# Altium PCB BalEv.PcbDoc
Units mm, origin at the board's own origin, x right, y up, seen from the top; angles counter-clockwise.
Board outline 110 x 150 mm, 4 copper layers (Top Layer, Ground, Power, Bottom Layer), stack 1.536 mm thick; 142 components, 56 nets, 403 pads, 44 vias.
Unrouted connection lines stored in the file: 114.
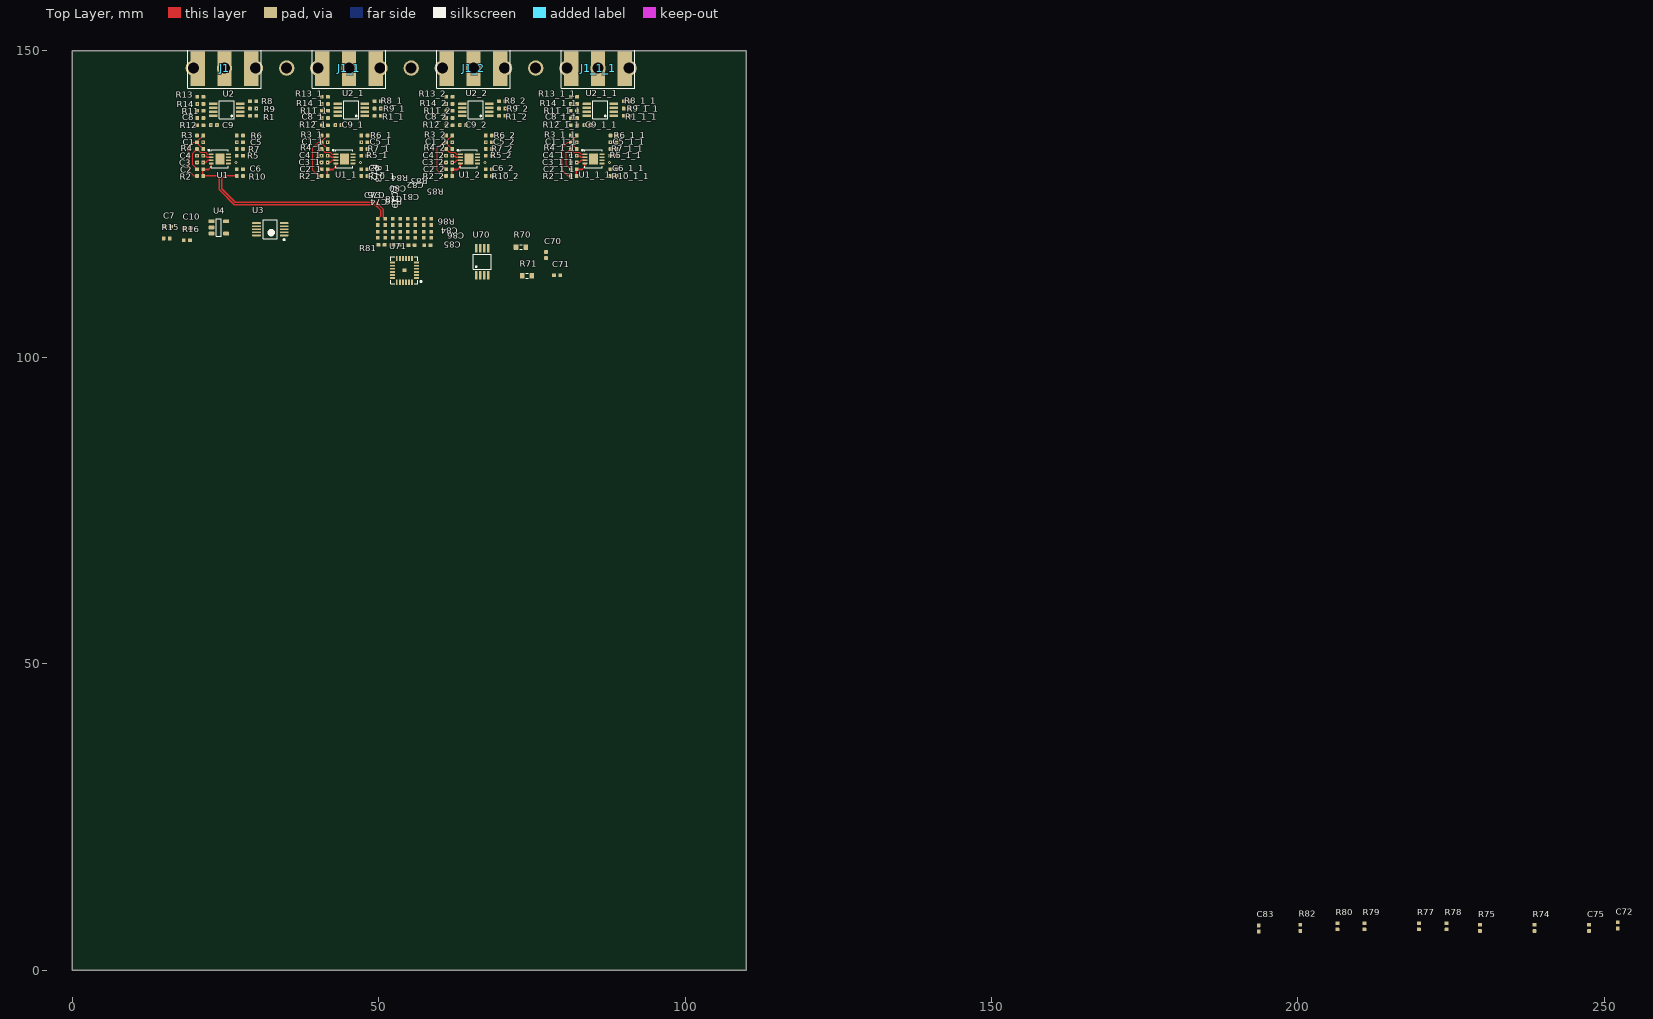
[diagram p0: Top Layer view]
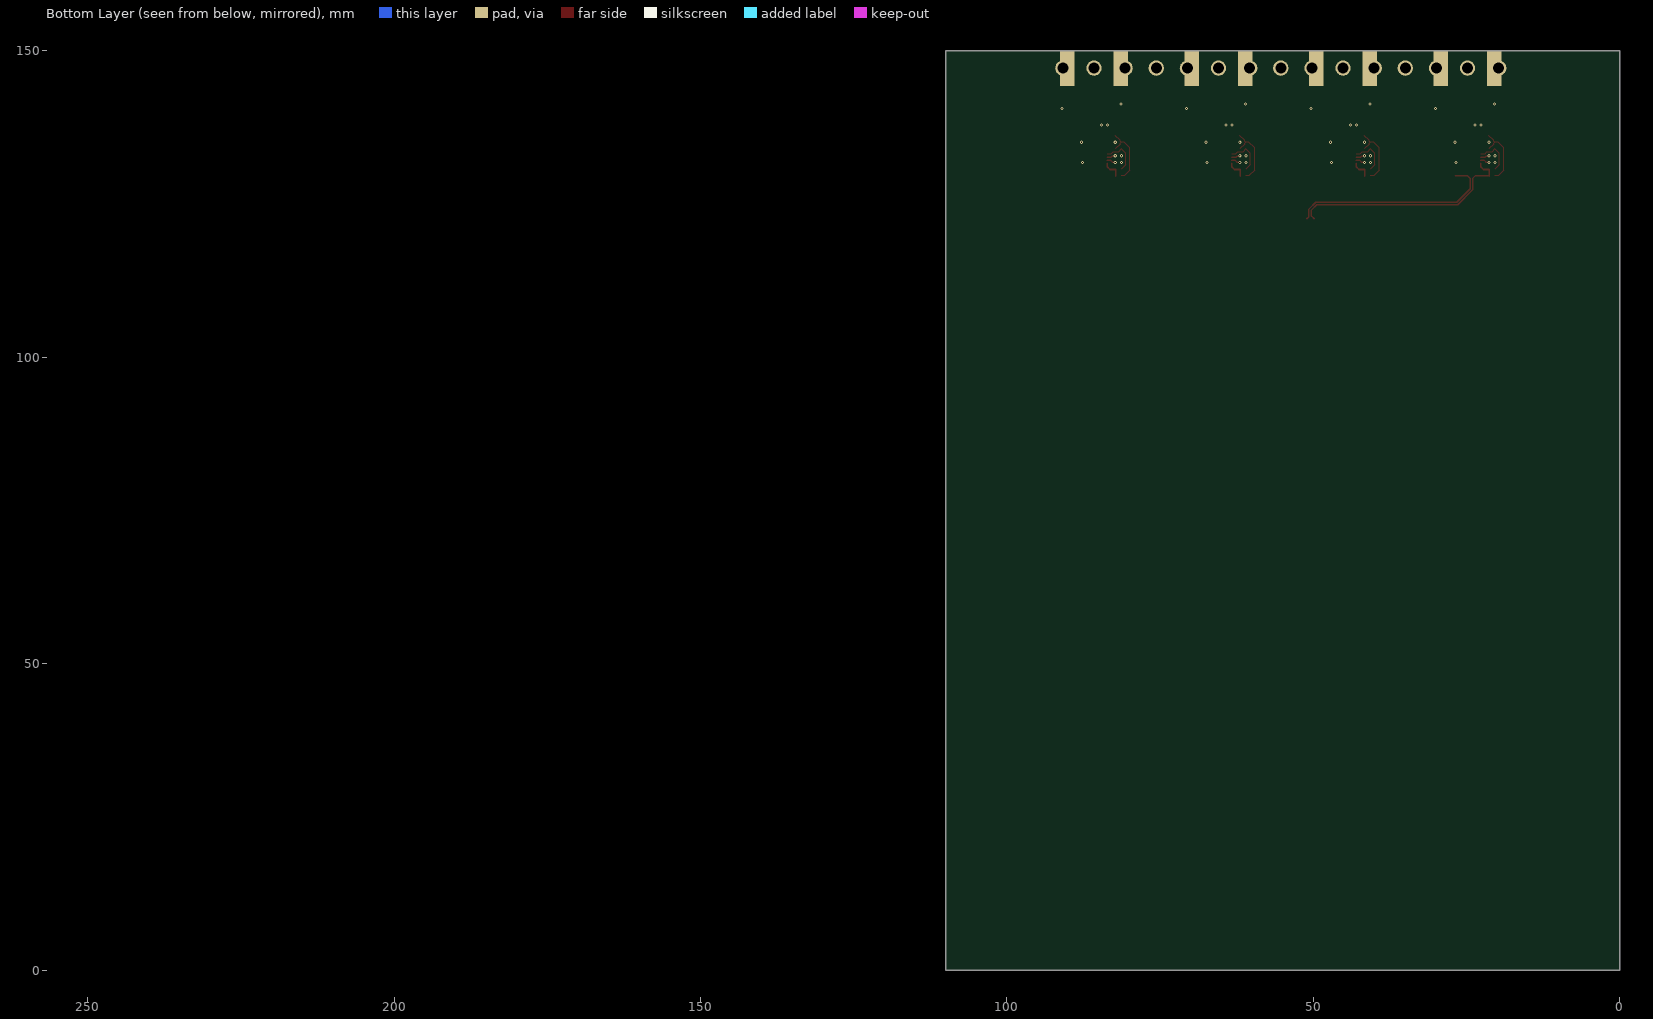
[diagram p1: Bottom Layer view, seen from below]
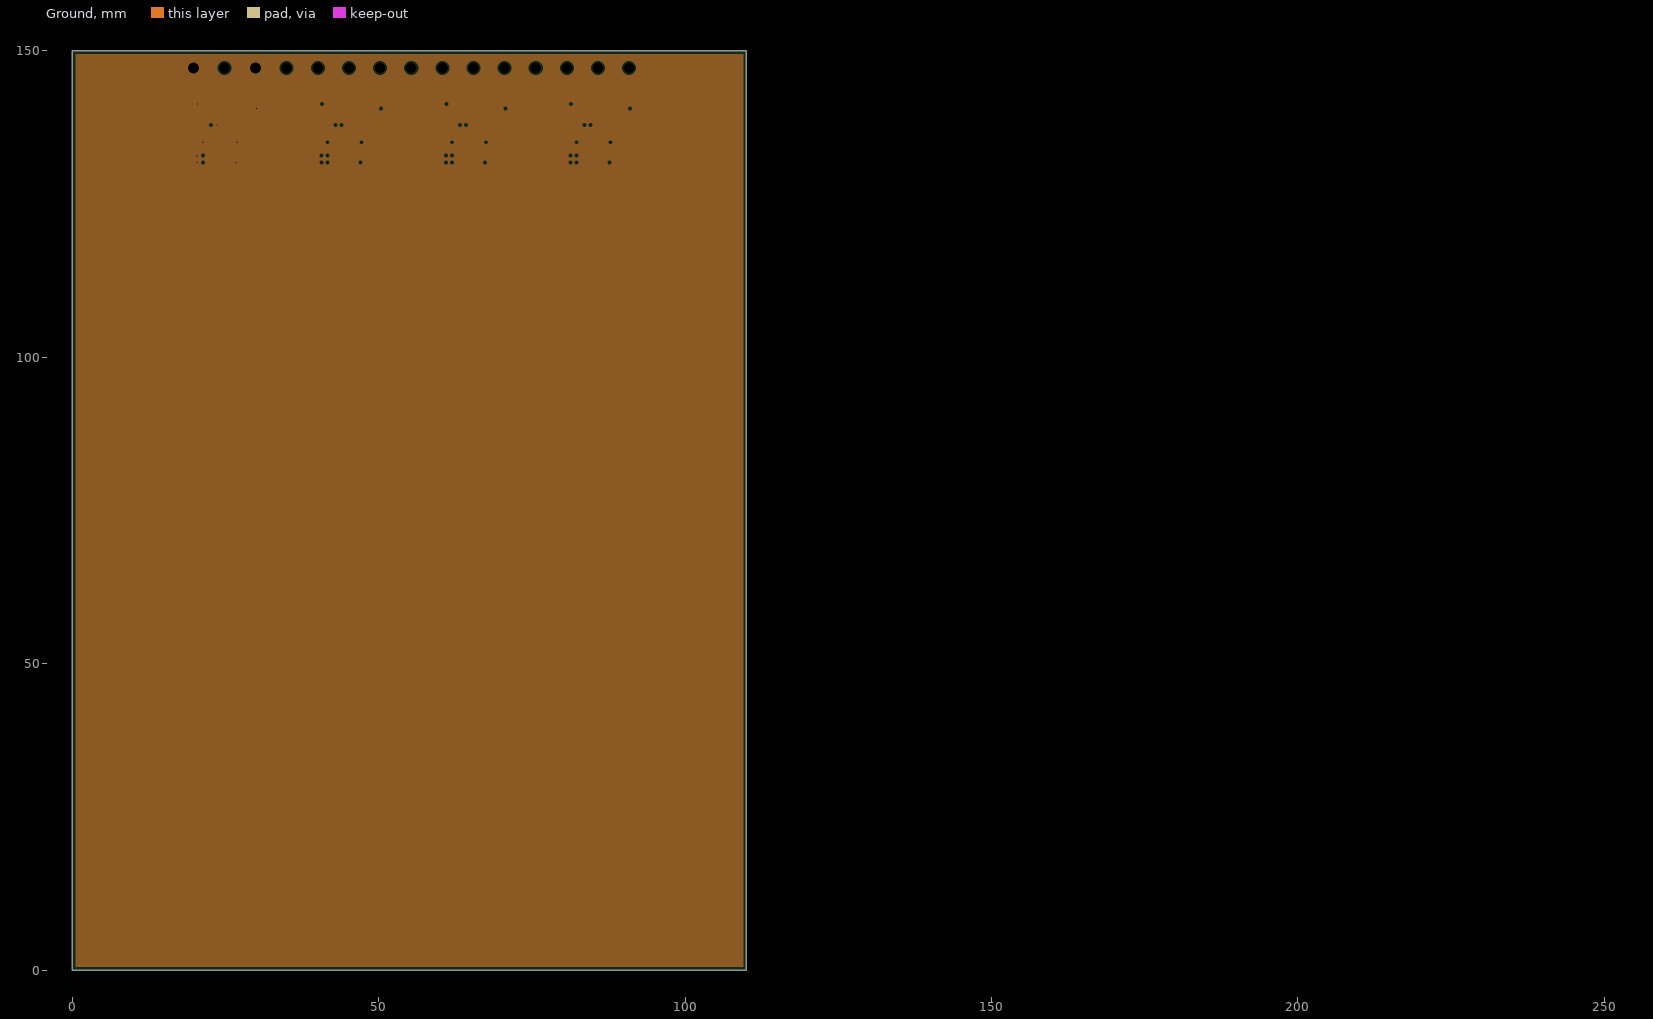
[diagram p2: Ground, clearances drawn from the general rule]
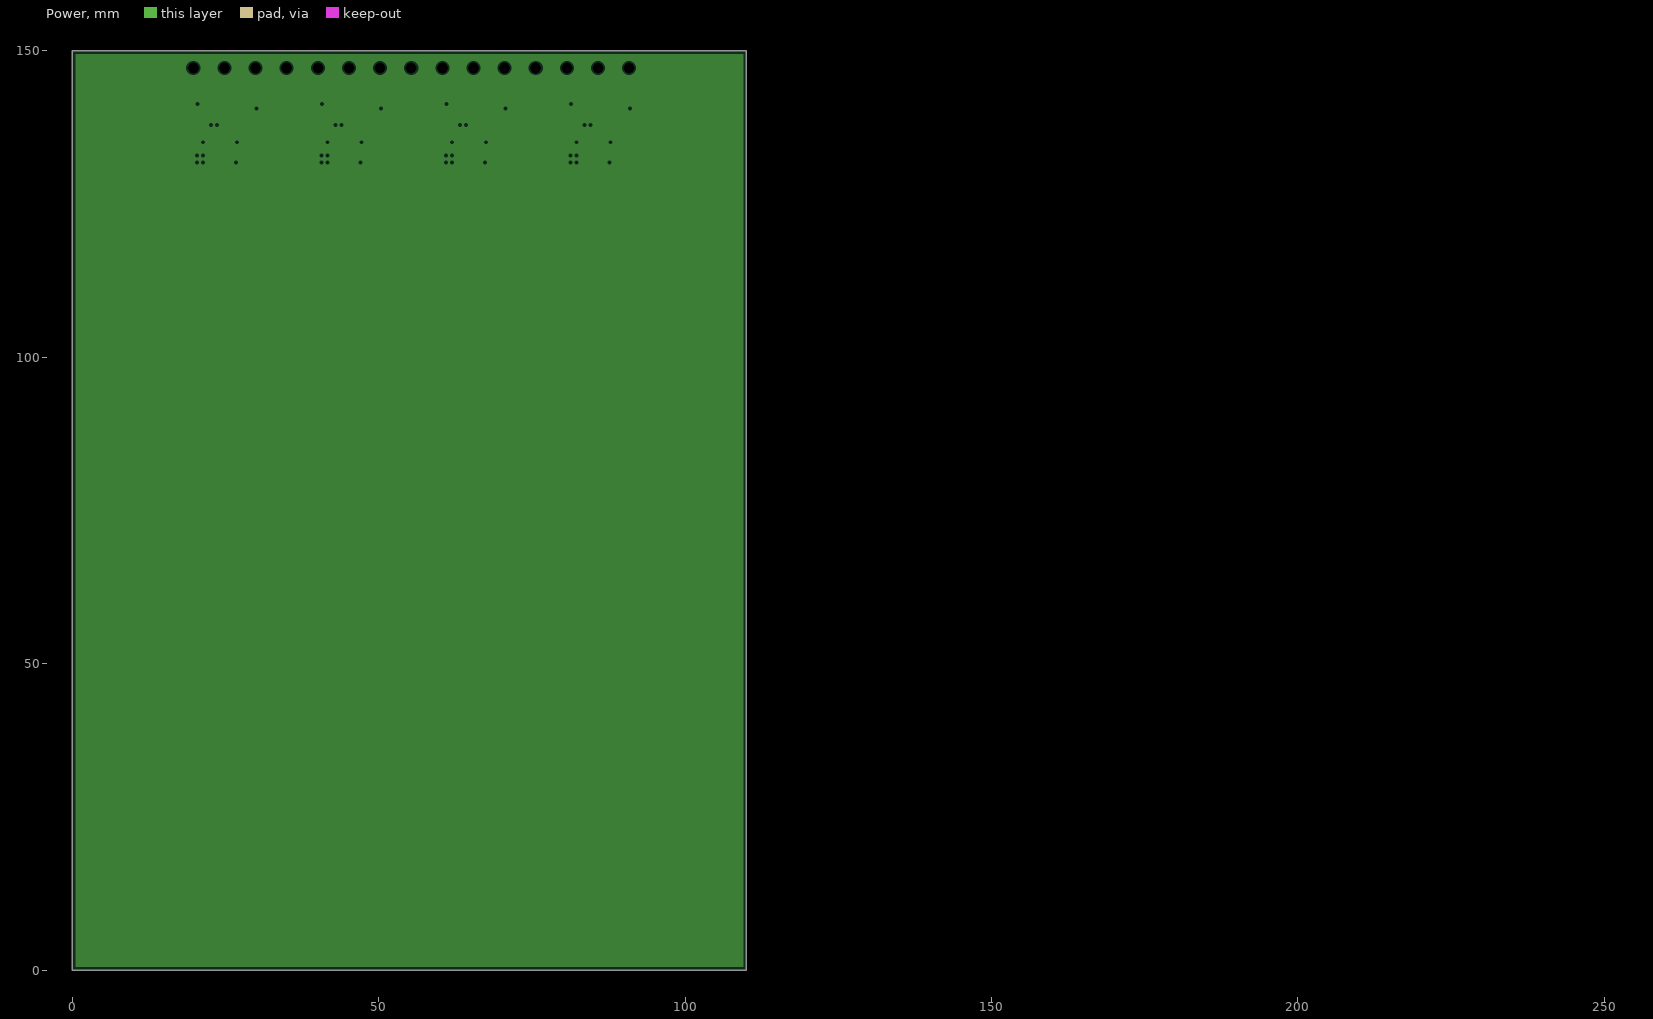
[diagram p3: Power, clearances drawn from the general rule]

## Layer stack, top to bottom
Top Solder: solder mask 0.01, Solder Resist, Dk 3.5
Top Layer: signal copper 0.018
Dielectric 1: prepreg 0.36, PP-006, Dk 4.1
Ground: plane copper 0.035, net GND
Dielectric 2: prepreg 0.71, PP-006, Dk 4.1
Power: plane copper 0.035
Dielectric1: core 0.36, FR-4, Dk 4.8
Bottom Layer: signal copper 0.018
Bottom Solder: solder mask 0.01, Solder Resist, Dk 3.5

## Board outline
0,0 0,150 110,150 110,0

## Design rules (kind name [scope] priority, off if disabled: settings)
AssemblyTestPointUsage [All] p1 off:
AssemblyTestpoint [All] p1 off: testpointundercomponent=TRUE minsize=1.016 maxsize=2.54 preferedsize=1.524 minholesize=0 maxholesize=1.016 preferedholesize=0.813 testpointgrid=0.025 usegrid=TRUE gridtolerance=0 allowsidetop=TRUE allowsidebottom=TRUE
BoardOutlineClearance [All] p1 off: gap=0.25 ignorepadtopadclearanceinfootprint=FALSE except(0: Arc-SplitContinuation Track-SplitContinuation SMDPad-SplitContinuation THPad-SplitContinuation Via-SplitContinuation Fill-SplitContinuation Poly-SplitContinuation Region-SplitContinuation Text-SplitContinuation)
Clearance [All] p1: gap=0.15 ignorepadtopadclearanceinfootprint=FALSE
ComponentClearance [All] p1: gap=0.25 collisioncheckmode=3 verticalgap=0 showdistances=FALSE
DiffPairsRouting [All] p1 off: maxlimit=0.25 minlimit=0.25 mostfreqgap=0.25 toplayer_minwidth=0.381 toplayer_maxwidth=0.381 toplayer_prefwidth=0.381 bottomlayer_minwidth=0.381 bottomlayer_maxwidth=0.381 bottomlayer_prefwidth=0.381 maxuncoupledlength=12.5
FabricationTestPointUsage [All] p1 off: valid=0 allowmultiple=FALSE
FabricationTestpoint [All] p1 off: side=3 testpointundercomponent=TRUE minsize=1.016 maxsize=2.54 preferedsize=1.524 minholesize=0 maxholesize=1.016 preferedholesize=0.813 testpointgrid=0.025 allowsidetop=TRUE allowsidebottom=TRUE usegrid=TRUE gridtolerance=0
FanoutControl Fanout_BGA [IsBGA] p1 off: bgadir=Out bgaviamode=Centered fanoutstyle=Auto fanoutdirection=Alternating viagrid=0.025 // Fanout_BGA (Default Rule)
FanoutControl Fanout_LCC [IsLCC] p2 off: bgadir=Out bgaviamode=Centered fanoutstyle=Auto fanoutdirection=Alternating viagrid=0.025 // Fanout_LCC (Default Rule)
FanoutControl Fanout_SOIC [IsSOIC] p3 off: bgadir=Out bgaviamode=Centered fanoutstyle=Auto fanoutdirection=Alternating viagrid=0.025 // Fanout_SOIC (Default Rule)
FanoutControl Fanout_Small [(CompPinCount < 5)] p4 off: bgadir=Out bgaviamode=Centered fanoutstyle=Auto fanoutdirection=OutThenIn viagrid=0.025 // Fanout_Small (Default Rule)
FanoutControl Fanout_Default [All] p5 off: bgadir=Out bgaviamode=Centered fanoutstyle=Auto fanoutdirection=Alternating viagrid=0.025 // Fanout_Default (Default Rule)
Height [All] p1 off: minheight=0 maxheight=500 prefheight=12.5
HoleSize HoleSize-PTH [All] p1: absolutevalues=TRUE maxlimit=10 minlimit=0.15 maxpercent=80.000 minpercent=20.000
HoleToHoleClearance [All] p1 off: gap=0.35 allowstackedmicrovias=TRUE
LayerPairs [All] p1 off: enforce=TRUE
MinimumAnnularRing "Minimum IAR  >0.45mm" [((ObjectKind = 'Pad') OR (ObjectKind = 'Via')) And (Layer = 'MultiLayer') And (HoleDiameter > AsMM(0.45))] p1 off: minimumring=0.175 // minimum inner annular ring for pads > 0.45mm finished hole size
MinimumAnnularRing "Minimum IAR <=0.45mm" [((ObjectKind = 'Pad') OR (ObjectKind = 'Via')) And (Layer = 'MultiLayer') And (HoleDiameter <= AsMM(0.45))] p2 off: minimumring=0.1 // minimum inner annular ring for pads <= 0.45mm finished hole size
MinimumSolderMaskSliver [All] p1 off: minsoldermaskwidth=0.08
NetAntennae [All] p1 off: netantennaetolerance=0
PasteMaskExpansion [All] p1 off: expansion=0
PlaneClearance PlaneClearance-IPI [All] p1: clearance=0.25
PlaneConnect [All] p1: planeconnectstyle=Direct reliefexpansion=0.175 reliefentries=4 reliefconductorwidth=0.2 reliefairgap=0.2
PolygonConnect PolygonConnect-xTW [All] p1: connectstyle=Direct reliefconductorwidth=0.5 reliefentries=4 polygonreliefangle="90 Angle" airgapwidth=0.5
RoutingCorners [All] p1 off: cornerstyle=45-Degree minsetback=2.5 maxsetback=2.5
RoutingLayers [All] p1 off: top layer_v5=TRUE bottom layer_v5=TRUE
RoutingPriority [All] p1 off: routingpriority=0
RoutingTopology [All] p1 off: topology=Shortest
RoutingVias [All] p1: holewidth=0.25 width=0.8 viastyle="Through Hole" minholewidth=0.15 minwidth=0.5 maxholewidth=0.45 maxwidth=0.8 useviatemplates=TRUE viatemplateguid#1={B5015574-1706-43D0-909C-7C5F51C7AC2F} viatemplatename#1=v50h15m0mx0 // finishet hole size <= 0.45mm
SilkToSilkClearance [All] p1 off: silktosilkclearance=0.2
SilkToSolderMaskClearance SilkscreenOverComponentPads [IsPad] p1 off: minsilkscreentomaskgap=0.2 clearancetoexposedcopper=TRUE
SolderMaskExpansion [All] p1 off: expansion=0 istentingtop=FALSE
UnRoutedNet [All] p1: checkbadconnections=TRUE
Width Width-xTW [All] p1: maxlimit=0.6 minlimit=0.15 preferedwidth=0.3
3 further rules are at their usual default settings.

## Classes and differential pairs
component class BalEv_ADC_v1_0: C70 C71 C72 C73 C74 C75 C76 C77 C78 C79 C80 C81 C82 C83 C84 C85 C86 R70 R71 R72 R73 R74 R75 R76 R77 R78 R79 R80 R81 R82 R83 R84 R85 R86 U70 U71
component class BalEv_AINa_v1_0: C1 C2 C3 C4 C5 C6 C7 C8 C9 C10 J1 R1 R2 R3 R4 R5 R6 R7 R8 R9 R10 R11 R12 R13 R14 R15 R16 U1 U2 U3 U4

## Components (designator, comment, footprint, x,y, rotation, side; value= is the part's Value field where it differs from the comment)
C1 "NC" "CAPACITOR 1005 REFLOW" 20.85,135.1 r180 top
C1_1 "NC" "CAPACITOR 1005 REFLOW" 41.17,135.1 r180 top
C1_1_1 "NC" "CAPACITOR 1005 REFLOW" 81.81,135.1 r180 top
C1_2 "NC" "CAPACITOR 1005 REFLOW" 61.49,135.1 r180 top
C2 "22pF" "CAPACITOR 1005 REFLOW" 20.85,130.7 r180 top
C2_1 "22pF" "CAPACITOR 1005 REFLOW" 41.17,130.7 r180 top
C2_1_1 "22pF" "CAPACITOR 1005 REFLOW" 81.81,130.7 r180 top
C2_2 "22pF" "CAPACITOR 1005 REFLOW" 61.49,130.7 r180 top
C3 "100nF" "CAPACITOR 1005 REFLOW" 20.85,131.8 r0 top
C3_1 "100nF" "CAPACITOR 1005 REFLOW" 41.17,131.8 r0 top
C3_1_1 "100nF" "CAPACITOR 1005 REFLOW" 81.81,131.8 r0 top
C3_2 "100nF" "CAPACITOR 1005 REFLOW" 61.49,131.8 r0 top
C4 "100nF" "CAPACITOR 1005 REFLOW" 20.85,132.9 r0 top
C4_1 "100nF" "CAPACITOR 1005 REFLOW" 41.17,132.9 r0 top
C4_1_1 "100nF" "CAPACITOR 1005 REFLOW" 81.81,132.9 r0 top
C4_2 "100nF" "CAPACITOR 1005 REFLOW" 61.49,132.9 r0 top
C5 "NC" "CAPACITOR 1005 REFLOW" 27.35,135.1 r180 top
C5_1 "NC" "CAPACITOR 1005 REFLOW" 47.67,135.1 r180 top
C5_1_1 "NC" "CAPACITOR 1005 REFLOW" 88.31,135.1 r180 top
C5_2 "NC" "CAPACITOR 1005 REFLOW" 67.99,135.1 r180 top
C6 "22pF" "CAPACITOR 1005 REFLOW" 27.35,130.7 r0 top
C6_1 "22pF" "CAPACITOR 1005 REFLOW" 47.67,130.7 r0 top
C6_1_1 "22pF" "CAPACITOR 1005 REFLOW" 88.31,130.7 r0 top
C6_2 "22pF" "CAPACITOR 1005 REFLOW" 67.99,130.7 r0 top
C7 "100nF" "CAPACITOR 1005 REFLOW" 15.6,121.3 r180 top
C8 "470pF" "CAPACITOR 1005 REFLOW" 20.9,139.05 r180 top
C8_1 "470pF" "CAPACITOR 1005 REFLOW" 41.22,139.05 r180 top
C8_1_1 "470pF" "CAPACITOR 1005 REFLOW" 81.86,139.05 r180 top
C8_2 "470pF" "CAPACITOR 1005 REFLOW" 61.54,139.05 r180 top
C9 "100nF" "CAPACITOR 1005 REFLOW" 23.1,137.9 r0 top
C9_1 "100nF" "CAPACITOR 1005 REFLOW" 43.42,137.9 r0 top
C9_1_1 "100nF" "CAPACITOR 1005 REFLOW" 84.06,137.9 r0 top
C9_2 "100nF" "CAPACITOR 1005 REFLOW" 63.74,137.9 r0 top
C10 "100nF" "CAPACITOR 1005 REFLOW" 18.775,121.1 r0 top
C70 "100n" "CAPACITOR 1005 REFLOW" 77.3,116.7 r90 top
C71 "100n" "CAPACITOR 1005 REFLOW" 79.1,113.4 r0 top
C72 "1u" "CAPACITOR 1005 REFLOW" 252.2,7.3 r90 top
C73 "68pF" "CAPACITOR 1005 REFLOW" 49.85,120 r90 top
C74 "68pF" "CAPACITOR 1005 REFLOW" 50.45,118.35 r180 top
C75 "1u" "CAPACITOR 1005 REFLOW" 247.499,6.899 r90 top
C76 "68pF" "CAPACITOR 1005 REFLOW" 51.05,120 r270 top
C77 "68pF" "CAPACITOR 1005 REFLOW" 52.301,119.999 r90 top
C78 "68pF" "CAPACITOR 1005 REFLOW" 52.901,118.349 r180 top
C79 "68pF" "CAPACITOR 1005 REFLOW" 53.501,119.999 r270 top
C80 "68pF" "CAPACITOR 1005 REFLOW" 54.751,119.999 r90 top
C81 "68pF" "CAPACITOR 1005 REFLOW" 55.351,118.299 r180 top
C82 "68pF" "CAPACITOR 1005 REFLOW" 55.951,119.999 r270 top
C83 "100n" "CAPACITOR 1005 REFLOW" 193.6,6.8 r90 top
C84 "68pF" "CAPACITOR 1005 REFLOW" 58.55,119.999 r90 top
C85 "68pF" "CAPACITOR 1005 REFLOW" 57.95,118.299 r0 top
C86 "68pF" "CAPACITOR 1005 REFLOW" 57.35,119.999 r270 top
J1 "AIN0" "SMA EDGE Molex 732511150" 24.82,150.1 r270 top
J1_1 "AIN0" "SMA EDGE Molex 732511150" 45.14,150.1 r270 top
J1_1_1 "AIN0" "SMA EDGE Molex 732511150" 85.78,150.1 r270 top
J1_2 "AIN0" "SMA EDGE Molex 732511150" 65.46,150.1 r270 top
R1 "4.7k" "RESISTOR 1005 REFLOW" 29.5,139.4 r180 top
R1_1 "4.7k" "RESISTOR 1005 REFLOW" 49.82,139.4 r180 top
R1_1_1 "4.7k" "RESISTOR 1005 REFLOW" 90.46,139.4 r180 top
R1_2 "4.7k" "RESISTOR 1005 REFLOW" 70.14,139.4 r180 top
R2 "2k" "RESISTOR 1005 REFLOW" 20.85,129.6 r0 top
R2_1 "2k" "RESISTOR 1005 REFLOW" 41.17,129.6 r0 top
R2_1_1 "2k" "RESISTOR 1005 REFLOW" 81.81,129.6 r0 top
R2_2 "2k" "RESISTOR 1005 REFLOW" 61.49,129.6 r0 top
R3 "1k" "RESISTOR 1005 REFLOW" 20.85,136.2 r0 top
R3_1 "1k" "RESISTOR 1005 REFLOW" 41.17,136.2 r0 top
R3_1_1 "1k" "RESISTOR 1005 REFLOW" 81.81,136.2 r0 top
R3_2 "1k" "RESISTOR 1005 REFLOW" 61.49,136.2 r0 top
R4 "0" "RESISTOR 1005 REFLOW" 20.85,134 r0 top
R4_1 "0" "RESISTOR 1005 REFLOW" 41.17,134 r0 top
R4_1_1 "0" "RESISTOR 1005 REFLOW" 81.81,134 r0 top
R4_2 "0" "RESISTOR 1005 REFLOW" 61.49,134 r0 top
R5 "NC" "RESISTOR 1005 REFLOW" 27.35,132.9 r0 top
R5_1 "NC" "RESISTOR 1005 REFLOW" 47.67,132.9 r0 top
R5_1_1 "NC" "RESISTOR 1005 REFLOW" 88.31,132.9 r0 top
R5_2 "NC" "RESISTOR 1005 REFLOW" 67.99,132.9 r0 top
R6 "1k" "RESISTOR 1005 REFLOW" 27.35,136.2 r180 top
R6_1 "1k" "RESISTOR 1005 REFLOW" 47.67,136.2 r180 top
R6_1_1 "1k" "RESISTOR 1005 REFLOW" 88.31,136.2 r180 top
R6_2 "1k" "RESISTOR 1005 REFLOW" 67.99,136.2 r180 top
R7 "0" "RESISTOR 1005 REFLOW" 27.35,134 r0 top
R7_1 "0" "RESISTOR 1005 REFLOW" 47.67,134 r0 top
R7_1_1 "0" "RESISTOR 1005 REFLOW" 88.31,134 r0 top
R7_2 "0" "RESISTOR 1005 REFLOW" 67.99,134 r0 top
R8 "51" "RESISTOR 1005 REFLOW" 29.5,141.8 r180 top
R8_1 "51" "RESISTOR 1005 REFLOW" 49.82,141.8 r180 top
R8_1_1 "51" "RESISTOR 1005 REFLOW" 90.46,141.8 r180 top
R8_2 "51" "RESISTOR 1005 REFLOW" 70.14,141.8 r180 top
R9 "100K" "RESISTOR 1005 REFLOW" 29.5,140.6 r180 top
R9_1 "100K" "RESISTOR 1005 REFLOW" 49.82,140.6 r180 top
R9_1_1 "100K" "RESISTOR 1005 REFLOW" 90.46,140.6 r180 top
R9_2 "100K" "RESISTOR 1005 REFLOW" 70.14,140.6 r180 top
R10 "2k" "RESISTOR 1005 REFLOW" 27.35,129.6 r180 top
R10_1 "2k" "RESISTOR 1005 REFLOW" 47.67,129.6 r180 top
R10_1_1 "2k" "RESISTOR 1005 REFLOW" 88.31,129.6 r180 top
R10_2 "2k" "RESISTOR 1005 REFLOW" 67.99,129.6 r180 top
R11 "10k" "RESISTOR 1005 REFLOW" 20.9,140.25 r0 top
R11_1 "10k" "RESISTOR 1005 REFLOW" 41.22,140.25 r0 top
R11_1_1 "10k" "RESISTOR 1005 REFLOW" 81.86,140.25 r0 top
R11_2 "10k" "RESISTOR 1005 REFLOW" 61.54,140.25 r0 top
R12 "10k" "RESISTOR 1005 REFLOW" 20.9,137.85 r0 top
R12_1 "10k" "RESISTOR 1005 REFLOW" 41.22,137.85 r0 top
R12_1_1 "10k" "RESISTOR 1005 REFLOW" 81.86,137.85 r0 top
R12_2 "10k" "RESISTOR 1005 REFLOW" 61.54,137.85 r0 top
R13 "10k" "RESISTOR 1005 REFLOW" 20.9,142.5 r180 top
R13_1 "10k" "RESISTOR 1005 REFLOW" 41.22,142.5 r180 top
R13_1_1 "10k" "RESISTOR 1005 REFLOW" 81.86,142.5 r180 top
R13_2 "10k" "RESISTOR 1005 REFLOW" 61.54,142.5 r180 top
R14 "10k" "RESISTOR 1005 REFLOW" 20.9,141.35 r180 top
R14_1 "10k" "RESISTOR 1005 REFLOW" 41.22,141.35 r180 top
R14_1_1 "10k" "RESISTOR 1005 REFLOW" 81.86,141.35 r180 top
R14_2 "10k" "RESISTOR 1005 REFLOW" 61.54,141.35 r180 top
R15 "*" "RESISTOR 1005 REFLOW" 15.4,119.4 r0 top
R16 "*" "RESISTOR 1005 REFLOW" 18.7,119.1 r0 top
R70 "10k" "RESISTOR 1608 REFLOW" 73.2,118 r0 top
R71 "10k" "RESISTOR 1608 REFLOW" 74.2,113.3 r0 top
R72 "33" "RESISTOR 1005 REFLOW" 49.85,122.1 r270 top
R73 "33" "RESISTOR 1005 REFLOW" 51.05,122.1 r270 top
R74 "100" "RESISTOR 1005 REFLOW" 238.599,6.899 r90 top
R75 "100" "RESISTOR 1005 REFLOW" 229.699,6.899 r90 top
R76 "33" "RESISTOR 1005 REFLOW" 52.301,122.099 r270 top
R77 "NC" "RESISTOR 1005 REFLOW" 219.75,7.15 r90 top
R78 "NC" "RESISTOR 1005 REFLOW" 224.25,7.15 r90 top
R79 "100" "RESISTOR 1005 REFLOW" 210.85,7.15 r90 top
R80 "NC" "RESISTOR 1005 REFLOW" 206.45,7.15 r90 top
R81 "33" "RESISTOR 1005 REFLOW" 53.501,122.099 r270 top
R82 "100" "RESISTOR 1005 REFLOW" 200.399,6.899 r90 top
R83 "33" "RESISTOR 1005 REFLOW" 54.751,122.099 r270 top
R84 "33" "RESISTOR 1005 REFLOW" 55.951,122.099 r270 top
R85 "33" "RESISTOR 1005 REFLOW" 58.55,122.099 r270 top
R86 "33" "RESISTOR 1005 REFLOW" 57.35,122.099 r270 top
U1 "LTC6362_DD" "LFCSP8 P0.5 C3.0x2.8 H1.0" 24.075,132.4 r0 top
U1_1 "LTC6362_DD" "LFCSP8 P0.5 C3.0x2.8 H1.0" 44.395,132.4 r0 top
U1_1_1 "LTC6362_DD" "LFCSP8 P0.5 C3.0x2.8 H1.0" 85.035,132.4 r0 top
U1_2 "LTC6362_DD" "LFCSP8 P0.5 C3.0x2.8 H1.0" 64.715,132.4 r0 top
U2 "ADA4500-2" "MSOP8 P0.65 C3.0X3.0 H1.1" 25.2,140.4 r180 top
U2_1 "ADA4500-2" "MSOP8 P0.65 C3.0X3.0 H1.1" 45.52,140.4 r180 top
U2_1_1 "ADA4500-2" "MSOP8 P0.65 C3.0X3.0 H1.1" 86.16,140.4 r180 top
U2_2 "ADA4500-2" "MSOP8 P0.65 C3.0X3.0 H1.1" 65.84,140.4 r180 top
U3 "ADG804" TSSOP50P490X110-10N 32.3,120.9 r180 top
U4 "TLV???" "SOT23-5 P0.95 C1.6x3.0 H1.3" 23.9,121.2 r0 top
U70 "ADA4500-2" "MSOP8 P0.65 C3.0X3.0 H1.1" 66.9,115.6 r90 top
U71 "AD7380-4BCPZ" "QFN24 P0.5 T0.5x0.5 C4.0x4.0 H0.6" 54.2,114.2 r180 top

## Footprints (in the part's own frame and the unit in brackets; to place one, negate y for a bottom-side part, rotate by r counter-clockwise, add the part's x,y. Pads: shape width x height; smd on the part's side, far side on the other; paste and mask are expansions set on the pad)
"CAPACITOR 1005 REFLOW" [mm] "Capacitor SMD 1.0x0.5mm (0402-imperial)"
  rrect25% 0.6x0.6 smd: 1(-0.5,0) 2(0.5,0)
  body extent -0.5,-0.25 0.5,0.25, height 0.5
"LFCSP8 P0.5 C3.0x2.8 H1.0" [mm] "LFCSP8"
  rect 1.5x1.8 smd: 0(0,0)
  rrect50% 0.8x0.3 smd: 1(-1.4,0.75) 2(-1.4,0.25) 3(-1.4,-0.25) 4(-1.4,-0.75) 5(1.4,-0.75) 6(1.4,-0.25) 7(1.4,0.25) 8(1.4,0.75)
  silkscreen extent -1.9,-1.5 1.4,1.5, body extent -1.4,-1.5 1.4,1.5, height 1
"MSOP8 P0.65 C3.0X3.0 H1.1" [mm] "MSOP, 8-Leads, Body 3.00x3.00mm, Pitch 0.65mm, IPC Medium Density"
  rrect50% 1.35x0.45 smd: 1(-2.2,0.975) 2(-2.2,0.325) 3(-2.2,-0.325) 4(-2.2,-0.975) 5(2.2,-0.975) 6(2.2,-0.325) 7(2.2,0.325) 8(2.2,0.975)
  silkscreen extent -1.2,-1.5 1.2,1.5, body extent -1.55,-1.55 1.55,1.55, height 1.11
"QFN24 P0.5 T0.5x0.5 C4.0x4.0 H0.6" [mm] "QFN24 Pitch0.5 Thermal0.5x0.5 Case4.0x4.0 Height0.6"
  rect 0.85x0.3 smd: 1(-1.95,1.25) 2(-1.95,0.75) 3(-1.95,0.25) 4(-1.95,-0.25) 5(-1.95,-0.75) 6(-1.95,-1.25) 13(1.95,-1.25) 14(1.95,-0.75) 15(1.95,-0.25) 16(1.95,0.25) 17(1.95,0.75) 18(1.95,1.25)
  rect 0.3x0.85 smd: 7(-1.25,-1.95) 8(-0.75,-1.95) 9(-0.25,-1.95) 10(0.25,-1.95) 11(0.75,-1.95) 12(1.25,-1.95) 19(1.25,1.95) 20(0.75,1.95) 21(0.25,1.95) 22(-0.25,1.95) 23(-0.75,1.95) 24(-1.25,1.95)
  rect 0.6x0.6 smd: 25(0,0)
  silkscreen extent -2.83,-2.2 2.2,2.2, body extent -2.05,-2.05 2.05,2.05, height 0.6
"RESISTOR 1005 REFLOW" [mm] "Resistor SMD 1.0x0.5mm (0402-imperial)"
  rrect25% 0.6x0.6 smd: 1(-0.5,0) 2(0.5,0)
  body extent -0.5,-0.25 0.5,0.25, height 0.35
"RESISTOR 1608 REFLOW" [mm] "Resistor SMD 1.6x0.8mm (0603-imperial)"
  rrect25% 0.75x0.9 smd: 1(-0.8,0) 2(0.8,0)
  silkscreen extent -0.2,-0.4 0.2,0.4, body extent -0.77,-0.42 0.78,0.43, height 0.45
"SMA EDGE Molex 732511150" [mm] "Connector SMA, Board edge mount, SMA EDGE Molex 732511150"
  rect 5.8x2.3 smd: 1(2.9,0)
  rect 5.8x2.4 smd: 2(2.9,4.38) 2(2.9,-4.35)
  rect 5.8x2.4 smd far side: 2(2.9,4.38) 2(2.9,-4.35)
  silkscreen extent 0,-6 6.2,6, body extent -9.6,-4.76 4.67,4.76, height 4.36
"SOT23-5 P0.95 C1.6x3.0 H1.3" [mm] "SOT23, 5-Leads, Body 1.6x3.0mm, Pitch 0.95mm, IPC Medium Density"
  rrect50% 1x0.6 smd: 1(-1.2,1) 2(-1.2,0) 3(-1.2,-1) 4(1.2,-1) 5(1.2,1)
  silkscreen extent -0.4,-1.4 0.4,1.4, body extent -0.8,-1.5 0.8,1.5, height 1.3
TSSOP50P490X110-10N [mm] "TSSOP, 10-Leads, Body 3.00x3.00mm, Pitch 0.50mm, IPC Medium Density"
  rrect50% 1.4x0.3 smd: 1(-2.25,1) 2(-2.25,0.5) 3(-2.25,0) 4(-2.25,-0.5) 5(-2.25,-1) 6(2.25,-1) 7(2.25,-0.5) 8(2.25,0) 9(2.25,0.5) 10(2.25,1)
  silkscreen extent -2.38,-1.55 1.15,1.82, body extent -1.55,-1.55 1.55,1.55, height 1.1

## Part data
C1 C1_1 C1_1_1 C1_2 C2 C2_1 C2_1_1 C2_2 C3 C3_1 C3_1_1 C3_2 C4 C4_1 C4_1_1 C4_2 C5 C5_1 C5_1_1 C5_2 C6 C6_1 C6_1_1 C6_2 C7 C8 C8_1 C8_1_1 C8_2 C9 C9_1 C9_1_1 C9_2 C10 C70 C71 C72 C73 C74 C75 C76 C77 C78 C79 C80 C81 C82 C83 C84 C85 C86: library part Capacitor, "Capacitor"
J1 J1_1 J1_1_1 J1_2: library part "SMA EDGE Molex 732511150", "SMA EDGE Molex 732511150"
R1 R1_1 R1_1_1 R1_2 R2 R2_1 R2_1_1 R2_2 R3 R3_1 R3_1_1 R3_2 R4 R4_1 R4_1_1 R4_2 R5 R5_1 R5_1_1 R5_2 R6 R6_1 R6_1_1 R6_2 R7 R7_1 R7_1_1 R7_2 R8 R8_1 R8_1_1 R8_2 R9 R9_1 R9_1_1 R9_2 R10 R10_1 R10_1_1 R10_2 R11 R11_1 R11_1_1 R11_2 R12 R12_1 R12_1_1 R12_2 R13 R13_1 R13_1_1 R13_2 R14 R14_1 R14_1_1 R14_2 R15 R16 R72 R73 R74 R75 R76 R77 R78 R79 R80 R81 R82 R83 R84 R85 R86: library part Resistor, "Resistor"
R70 R71: library part Resistor, "Resistor 0.01% (RNCF0603TKW10K0)"
U1 U1_1 U1_1_1 U1_2: library part AD8139ACP, "IC OPAMP DIFF 410MHZ RRO 8LFCSP"
U2 U2_1 U2_1_1 U2_2 U70: library part "OPA DUAL", "Generic dual OPA 8 pins"
U4: library part "COMPARATOR SINGLE SOT23-5", "Generic Single Comparator 5pins 1OUT/2-V/3+IN/4-IN/5+V"
U71: "Differential Input, Quad, External Reference  / Simultaneous Sampling, 16-Bit, SAR ADC"

## Free pads (board coordinates)
  round 2.5 hole 1.8 unplated: 6(24.82,147.2) 7(19.74,147.2) 7(29.9,147.2) 7(34.98,147.2) 7(40.06,147.2) 7(45.14,147.2) 7(50.22,147.2) 7(55.3,147.2) 7(60.38,147.2) 7(65.46,147.2) 7(70.54,147.2) 7(75.62,147.2) 7(80.7,147.2) 7(85.78,147.2) 7(90.86,147.2)

## Via types
v1: diameter 0.5, hole 0.15, Top Layer to Bottom Layer, 44 vias

## Nets (pads, with @x,y where several pads share a name; then routed paths per layer and width w, separated by ;. In a path a pad name is that pad's centre, name@x,y a point inside that pad or via, vN(x,y) a via of type N, cw(c..) or ccw(c..) an arc to the next point about the centre after c; other vN are vias at no path point)
+3v3: C75.2 U71.2
+3v3A: C3.2 C7.1 C9.1 C10.1 C70.2 R5.2 U1.3 U2.8 U3.5 U3.6 U4.5 U70.8 U71.4 | length 1.5
  Top Layer w0.25: C3.2@21.325,131.775 21.418,131.868 21.818,131.868 22.075,132.125 22.65,132.125 U1.3
  other v1: 21.35,131.8 22.6,137.9
+ADCcm: C4.2 R3.1 U1.2 U70.6 U70.7 | length 1.4
  Top Layer w0.25: C4.2@21.325,132.85 21.825,132.85 22.025,132.65 U1.2
  other v1: 21.35,132.9
ACQ_TRIG: R15.2 U3.8
AIN0: J1.1 pad.6 R8.2 R9.2 U2.3
AIN0m: R1.2 R6.1 R13.1 U2.1
AIN0n: C6.1 R10.2 R73.1 U1.5 | length 33.7
  Top Layer w0.25: R10.2 24.8,129.6 24.4,129.2 24.4,127.5 26.6,125.3 49.6,125.3 50.7,124.2 50.7,122.95 R73.1
AIN0p: C2.1 R2.2 R72.1 U1.4 | length 37.2
  Top Layer w0.25: R2.2@21.3,129.55 21.3,130.65 22.225,130.65 22.675,131.1 U1.4 ; R2.2 23.6,129.6 24,129.2 24,127.334 26.434,124.9 49.434,124.9 50.3,124.034 50.3,123.05 R72.1
AIN0trig: C8.1 R12.2 U2.7 U3.2
AIN1n: R81.1
AIN1p: R76.1
AIN1trig: U3.9
AIN2n: R84.1
AIN2p: R83.1
AIN2trig: U3.4
AIN3n: R86.1
AIN3p: R85.1
AIN3trig: U3.7
FPGA_ACQ_TRIG: R16.1 U4.1
FPGA_ADC_nSC: R80.2 U71.18
FPGA_ADC_SCLK: R77.2 U71.22
FPGA_ADC_SDO_0: R74.2
FPGA_ADC_SDO_1: R75.2
FPGA_ADC_SDO_2: R79.2
FPGA_ADC_SDO_3: R82.2
GND: C1.1 C3.1 C4.1 C5.2 C7.2 C9.2 C10.2 C71.1 C72.1 C73.2 C75.1 C76.1 C77.2 C79.1 C80.2 C82.1 C83.1 C84.2 C86.1 J1.2 pad.7@19.74,147.2 pad.7@29.9,147.2 R8.1 R9.1 R11.1 R14.2 R71.1 R77.1 R78.1 R80.1 U1.0 U1.6 U2.4 U3.3 U4.2 U71.1 U71.5 U71.14 U71.16 U71.25
  other v1: 20.35,131.8 26.7,131.8 20.35,132.9 21.35,135.1 26.85,135.1 23.6,137.9 30.05,140.6 20.4,141.35
NetC1_2: C1.2 R2.1 R3.2 R4.2 | length 10.3
  Top Layer w0.2: R2.1 19.85,129.6 18.95,130.5 18.95,134.2 19.85,135.1 C1.2 ; R4.2 20.55,134.8 20.55,134.9 C1.2 ; R3.2 20.55,135.4 20.55,135.3 C1.2
NetC2_2: C2.2 R4.1 U1.1 | length 6.6
  Top Layer w0.2: C2.2 19.65,131.4 19.65,133.3 R4.1 20.9,133.45 21.755,133.45 22.055,133.15 U1.1
NetC5_1: C5.1 R6.2 R7.1 R10.1
NetC6_2: C6.2 R7.2 U1.8
NetC8_2: C8.2 R11.2 R12.1 U2.6
NetC70_1: C70.1 U70.4
NetC71_2: C71.2 R70.2 R71.2 U70.5
NetC72_2: C72.2 R70.1 U70.1 U70.2 U71.17
NetC73_1: C73.1 C74.2 R72.2 U71.13
NetC74_1: C74.1 C76.2 R73.2 U71.12
NetC77_1: C77.1 C78.2 R76.2 U71.11
NetC78_1: C78.1 C79.2 R81.2 U71.10
NetC80_1: C80.1 C81.2 R83.2 U71.9
NetC81_1: C81.1 C82.2 R84.2 U71.8
NetC83_2: C83.2 U71.3
NetC84_1: C84.1 C85.2 R85.2 U71.7
NetC85_1: C85.1 C86.2 R86.2 U71.6
NetR1_1: R1.1 U2.2
NetR5_1: R5.1 U1.7
NetR13_2: R13.2 R14.1 U2.5
NetR15_1: R15.1 R16.2 U4.3
NetR74_1: R74.1 U71.19
NetR75_1: R75.1 U71.20
NetR79_1: R79.1 U71.23
NetR82_1: R82.1 U71.24
STM_ACQ_TRIG_SRC0: U3.1
STM_ACQ_TRIG_SRC1: U3.10
STM_DAC_0: U4.4
STM_FPGA_MOSI: R78.2 U71.21
VREF+2v5: U70.3
pads on no net: C1_1.1 C1_1.2 C1_1_1.1 C1_1_1.2 C1_2.1 C1_2.2 C2_1.1 C2_1.2 C2_1_1.1 C2_1_1.2 C2_2.1 C2_2.2 C3_1.1 C3_1.2 C3_1_1.1 C3_1_1.2 C3_2.1 C3_2.2 C4_1.1 C4_1.2 C4_1_1.1 C4_1_1.2 C4_2.1 C4_2.2 C5_1.1 C5_1.2 C5_1_1.1 C5_1_1.2 C5_2.1 C5_2.2 C6_1.1 C6_1.2 C6_1_1.1 C6_1_1.2 C6_2.1 C6_2.2 C8_1.1 C8_1.2 C8_1_1.1 C8_1_1.2 C8_2.1 C8_2.2 C9_1.1 C9_1.2 C9_1_1.1 C9_1_1.2 C9_2.1 C9_2.2 J1_1.1 J1_1.2 J1_1_1.1 J1_1_1.2 J1_2.1 J1_2.2 R1_1.1 R1_1.2 R1_1_1.1 R1_1_1.2 R1_2.1 R1_2.2 R2_1.1 R2_1.2 R2_1_1.1 R2_1_1.2 R2_2.1 R2_2.2 R3_1.1 R3_1.2 R3_1_1.1 R3_1_1.2 R3_2.1 R3_2.2 R4_1.1 R4_1.2 R4_1_1.1 R4_1_1.2 R4_2.1 R4_2.2 R5_1.1 R5_1.2 R5_1_1.1 R5_1_1.2 R5_2.1 R5_2.2 R6_1.1 R6_1.2 R6_1_1.1 R6_1_1.2 R6_2.1 R6_2.2 R7_1.1 R7_1.2 R7_1_1.1 R7_1_1.2 R7_2.1 R7_2.2 R8_1.1 R8_1.2 R8_1_1.1 R8_1_1.2 R8_2.1 R8_2.2 R9_1.1 R9_1.2 R9_1_1.1 R9_1_1.2 R9_2.1 R9_2.2 R10_1.1 R10_1.2 R10_1_1.1 R10_1_1.2 R10_2.1 R10_2.2 R11_1.1 R11_1.2 R11_1_1.1 R11_1_1.2 R11_2.1 R11_2.2 R12_1.1 R12_1.2 R12_1_1.1 R12_1_1.2 R12_2.1 R12_2.2 R13_1.1 R13_1.2 R13_1_1.1 R13_1_1.2 R13_2.1 R13_2.2 R14_1.1 R14_1.2 R14_1_1.1 R14_1_1.2 R14_2.1 R14_2.2 U1_1.0 U1_1.1 U1_1.2 U1_1.3 U1_1.4 U1_1.5 U1_1.6 U1_1.7 U1_1.8 U1_1_1.0 U1_1_1.1 U1_1_1.2 U1_1_1.3 U1_1_1.4 U1_1_1.5 U1_1_1.6 U1_1_1.7 U1_1_1.8 U1_2.0 U1_2.1 U1_2.2 U1_2.3 U1_2.4 U1_2.5 U1_2.6 U1_2.7 U1_2.8 U2_1.1 U2_1.2 U2_1.3 U2_1.4 U2_1.5 U2_1.6 U2_1.7 U2_1.8 U2_1_1.1 U2_1_1.2 U2_1_1.3 U2_1_1.4 U2_1_1.5 U2_1_1.6 U2_1_1.7 U2_1_1.8 U2_2.1 U2_2.2 U2_2.3 U2_2.4 U2_2.5 U2_2.6 U2_2.7 U2_2.8 U71.15
copper on no net: | length 68.9
  Top Layer w0.2: 40.67,129.6 40.17,129.6 39.27,130.5 39.27,134.2 40.17,135.1 40.67,135.1 ; 40.67,130.7 39.97,131.4 39.97,133.3 40.67,134 41.22,133.45 42.075,133.45 42.375,133.15 42.995,133.15 ; 41.67,134 40.87,134.8 40.87,134.9 40.67,135.1 ; 41.67,136.2 40.87,135.4 40.87,135.3 40.67,135.1 ; 60.99,129.6 60.49,129.6 59.59,130.5 59.59,134.2 60.49,135.1 60.99,135.1 ; 60.99,130.7 60.29,131.4 60.29,133.3 60.99,134 61.54,133.45 62.395,133.45 62.695,133.15 63.315,133.15 ; 61.99,134 61.19,134.8 61.19,134.9 60.99,135.1 ; 61.99,136.2 61.19,135.4 61.19,135.3 60.99,135.1 ; 81.31,129.6 80.81,129.6 79.91,130.5 79.91,134.2 80.81,135.1 81.31,135.1 ; 81.31,130.7 80.61,131.4 80.61,133.3 81.31,134 81.86,133.45 82.715,133.45 83.015,133.15 83.635,133.15 ; 82.31,134 81.51,134.8 81.51,134.9 81.31,135.1 ; 82.31,136.2 81.51,135.4 81.51,135.3 81.31,135.1
  Top Layer w0.25: 41.62,129.55 41.62,130.65 42.545,130.65 42.995,131.1 42.995,131.65 ; v1@41.645,131.775 41.738,131.868 42.138,131.868 42.395,132.125 42.97,132.125 42.995,132.15 ; v1@41.645,132.85 42.145,132.85 42.345,132.65 42.995,132.65 ; 61.94,129.55 61.94,130.65 62.865,130.65 63.315,131.1 63.315,131.65 ; v1@61.965,131.775 62.058,131.868 62.458,131.868 62.715,132.125 63.29,132.125 63.315,132.15 ; v1@61.965,132.85 62.465,132.85 62.665,132.65 63.315,132.65 ; 82.26,129.55 82.26,130.65 83.185,130.65 83.635,131.1 83.635,131.65 ; v1@82.285,131.775 82.378,131.868 82.778,131.868 83.035,132.125 83.61,132.125 83.635,132.15 ; v1@82.285,132.85 82.785,132.85 82.985,132.65 83.635,132.65
  other v1: 40.67,131.8 41.67,131.8 47.02,131.8 60.99,131.8 61.99,131.8 67.34,131.8 81.31,131.8 82.31,131.8 87.66,131.8 40.67,132.9 41.67,132.9 60.99,132.9 61.99,132.9 81.31,132.9 82.31,132.9 41.67,135.1 47.17,135.1 61.99,135.1 67.49,135.1 82.31,135.1 87.81,135.1 42.92,137.9 43.92,137.9 63.24,137.9 64.24,137.9 83.56,137.9 84.56,137.9 50.37,140.6 70.69,140.6 91.01,140.6 40.72,141.35 61.04,141.35 81.36,141.35

## Polygon pours and split planes (outlines as drawn)
GND on Ground (split plane): 109.49,0.51 0.51,0.51 0.51,149.49 109.49,149.49
no net on Power (split plane): 109.49,0.51 0.51,0.51 0.51,149.49 109.49,149.49

## Silkscreen, mask and mechanical layers (free items; w line width, h text height)
Mechanical 1:
  lines w0.5: 24.82,147.2 44.82,147.2 ; 45.14,147.2 65.14,147.2 ; 65.46,147.2 85.46,147.2
Mechanical 2:
  lines w0.5: 19.74,147.2 24.82,147.2 29.9,147.2 34.98,147.2 40.06,147.2 45.14,147.2 50.22,147.2 55.3,147.2 60.38,147.2 65.46,147.2 70.54,147.2 75.62,147.2 80.7,147.2 85.78,147.2 90.86,147.2 ; 0,0 110,0 110,150 0,150 0,0